# EAGLE board CEM3340 VCO B002 (EAGLE 7.4.0)
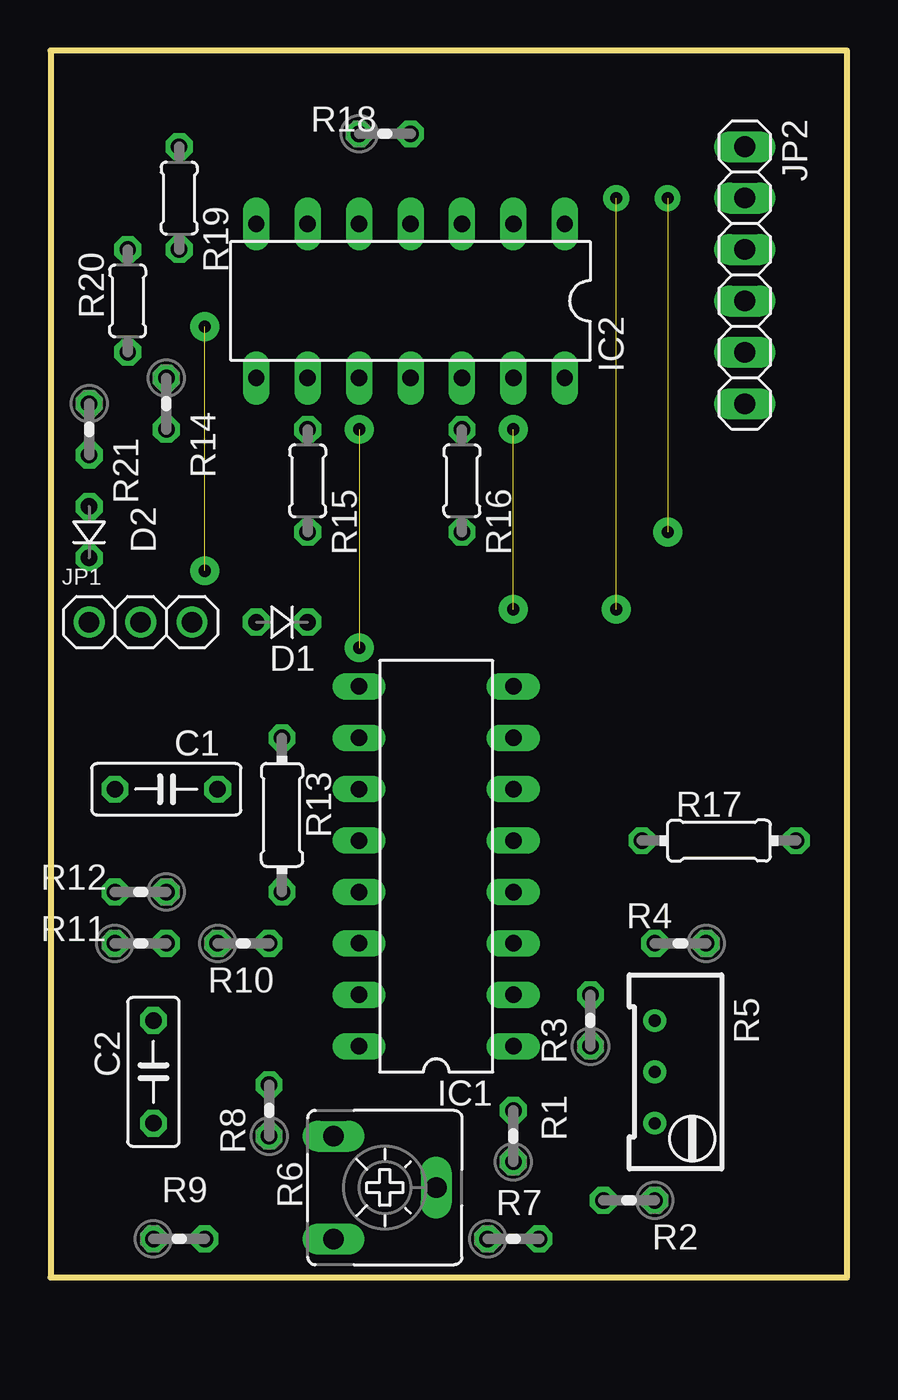
[diagram p0: board, top side]
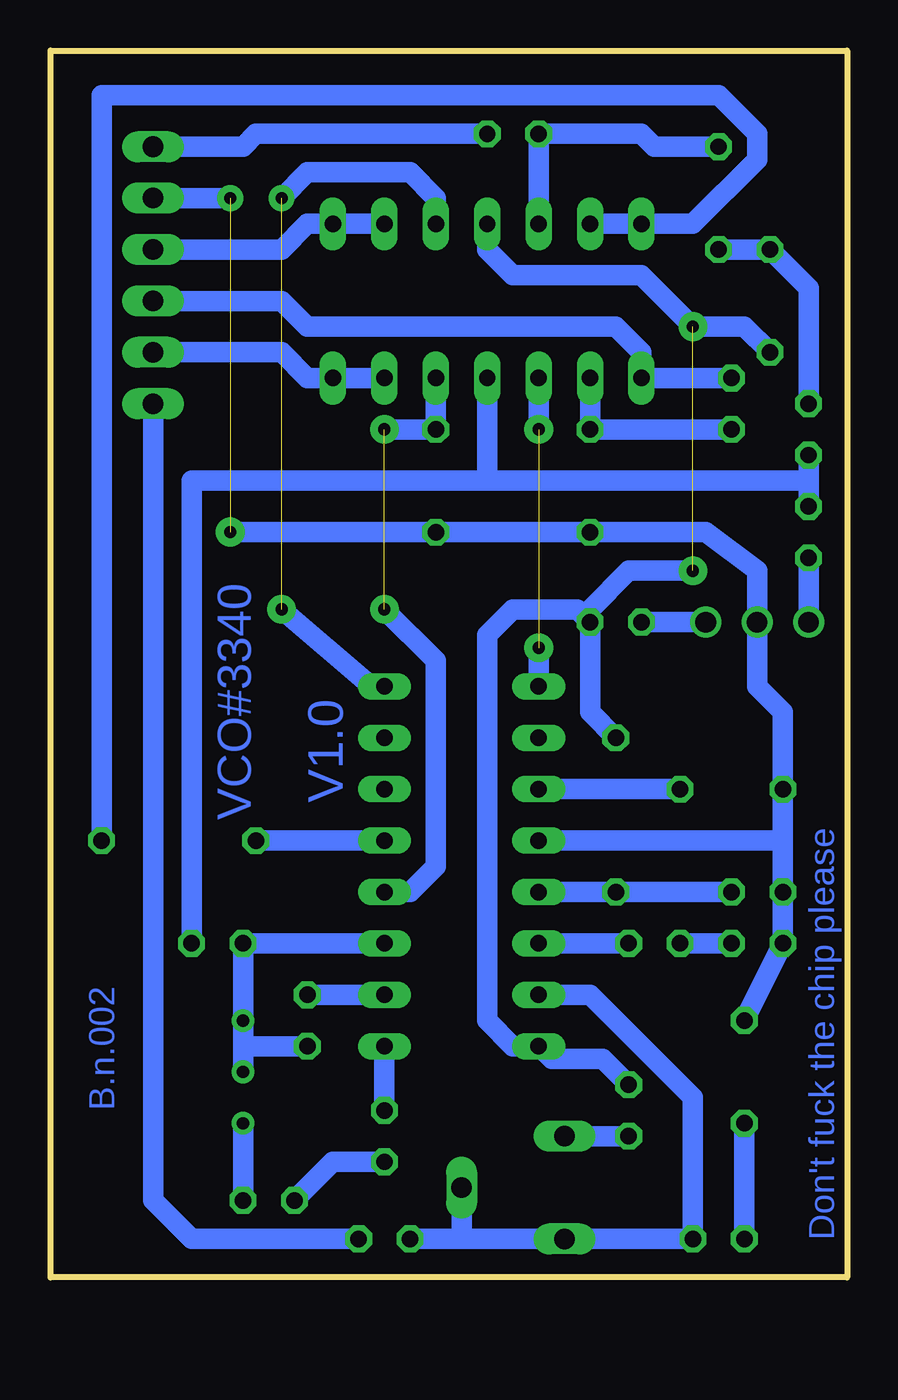
[diagram p1: board, bottom side, seen from below]

Size 39.35 x 60.63 mm. Coordinates in mm from the lower left corner, seen from the top.
Outline: 0,0 39.35,0 39.35,60.63 0,60.63 0,0
Copper layers (1*16): Top 0.035mm / dielectric 1.5mm / Bottom 0.035mm
Design rules "default": minimum track width 10mil, minimum drill 24mil, track to track 8mil, track to pad 8mil, pad to pad 8mil, via to via 8mil, smd to smd 8mil, copper to edge 40mil, drill to drill 8mil, minimum pad ring 10mil, minimum via ring 8mil, stop-mask expansion 4mil, vias tented up to drill 0mil, thermal gap 10mil

## Footprints (pad centres in the part's own frame; a part is rotated, then mirrored left to right if it is on the bottom)
C050-025X075 = drill 0.813 octagon: 1 -2.54,0; 2 2.54,0
D-2.5 = drill 0.813 octagon: A 1.27,0; C -1.27,0
DIL16 = drill 0.813 long: 1 -8.89,-3.81; 2 -6.35,-3.81; 3 -3.81,-3.81; 4 -1.27,-3.81; 5 1.27,-3.81; 6 3.81,-3.81; 7 6.35,-3.81; 8 8.89,-3.81; 9 8.89,3.81; 10 6.35,3.81; 11 3.81,3.81; 12 1.27,3.81; 13 -1.27,3.81; 14 -3.81,3.81; 15 -6.35,3.81; 16 -8.89,3.81
DIL14 = drill 0.813 long: 1 -7.62,-3.81; 2 -5.08,-3.81; 3 -2.54,-3.81; 4 0,-3.81; 5 2.54,-3.81; 6 5.08,-3.81; 7 7.62,-3.81; 8 7.62,3.81; 9 5.08,3.81; 10 2.54,3.81; 11 0,3.81; 12 -2.54,3.81; 13 -5.08,3.81; 14 -7.62,3.81
1X03 = drill 1.016: 1 -2.54,0; 2 0,0; 3 2.54,0
1X06 = drill 1.016 long: 1 -6.35,0; 2 -3.81,0; 3 -1.27,0; 4 1.27,0; 5 3.81,0; 6 6.35,0
0204V = drill 0.813 octagon: 1 -1.27,0; 2 1.27,0
RTRIM64W = drill 0.61: 1 1.27,-2.54; 2 1.27,0; 3 1.27,2.54
CA6V = drill 1.016 long: A -2.54,-2.54; E 2.54,-2.54; S 0,2.54
0204/7 = drill 0.813 octagon: 1 -3.81,0; 2 3.81,0
0204/5 = drill 0.813 octagon: 1 -2.54,0; 2 2.54,0

## Placement (x,y rotation side)
C1  [C050-025X075]  5.71,24.13 0 top
C2  [C050-025X075]  5.08,10.16 90 top
D1  [D-2.5]  11.43,32.38 180 top
D2  [D-2.5]  1.91,36.83 90 top
IC1  CEM3340  [DIL16]  19.05,20.32 90 top
IC2  TL084P  [DIL14]  17.78,48.26 180 top
JP1  [1X03]  4.45,32.38 0 top
JP2  [1X06]  34.29,49.53 270 top
R1  [0204V]  22.86,6.99 90 top
R2  [0204V]  28.57,3.81 180 top
R3  [0204V]  26.67,12.7 90 top
R4  [0204V]  31.11,16.51 180 top
R5  [RTRIM64W]  31.11,10.16 180 top
R6  [CA6V]  16.51,4.45 270 top
R7  [0204V]  22.86,1.91 0 top
R8  [0204V]  10.79,8.26 90 top
R9  [0204V]  6.35,1.91 0 top
R10  [0204V]  9.53,16.51 0 top
R11  [0204V]  4.45,16.51 0 top
R12  [0204V]  4.45,19.05 180 top
R13  [0204/7]  11.43,22.86 270 top
R14  [0204V]  5.71,43.18 270 top
R15  [0204/5]  12.7,39.37 270 top
R16  [0204/5]  20.32,39.37 270 top
R17  [0204/7]  33.02,21.59 0 top
R18  [0204V]  16.51,56.52 0 top
R19  [0204/5]  6.35,53.34 270 top
R20  [0204/5]  3.81,48.26 90 top
R21  [0204V]  1.91,41.91 270 top

## Library data of the parts
C1 C2 R1-R4 R7-R21 = resistor
D1 D2 = diode
IC1 = CEM
IC2 = linear
JP1 = adafruit
JP2 = pinhead
R5 = rcl
R6 = pot

## Nets
GND: C1.1 C2.2 IC1.12 JP1.2 JP2.2 R11.1 R12.2 R15.2 R16.2
N$1: IC1.1 R1.2
N$2: R1.1 R2.2
N$3: R2.1 R5.3
N$4: IC1.3 R3.1 R4.2 R5.1 R5.2
N$5: IC1.14 R10.2
N$6: IC1.2 R3.2
N$7: R10.1 R11.2
N$8: IC1.13 R12.1 R13.2
N$9: JP2.6 R7.2
N$10: C1.2 IC1.11
N$11: IC2.1 IC2.2 JP2.3
N$12: IC1.8 IC2.3
N$13: R6.A R8.1
N$14: IC1.5 R17.1
N$15: IC1.15 R6.E R6.S R7.1 R9.2
N$16: C2.1 R9.1
N$17: IC2.9 R14.2 R15.1
N$18: IC2.8 JP2.4 R14.1
N$19: IC1.9 IC2.10
N$20: IC2.13 IC2.14 JP2.5
N$21: JP2.1 R18.2
N$22: IC1.4 IC2.12 R16.1
N$23: IC2.6 IC2.7 R17.2
N$24: R19.2 R20.2 R21.1
N$25: IC2.5 R18.1 R19.1
N$30: D1.A JP1.3
N$33: D2.C JP1.1
V+: D1.C IC1.16 IC2.4 R8.2 R13.1 R20.1
V-: D2.A IC2.11 R4.1 R21.2

## Tracks (layer width: path | path; a pad name or v marks a point on that pad's centre or on a via)
GND  (via drill 0.6 pad 1.42)  (1 unrouted)
  Bottom 1.016: C1.1 3.17,27.94 4.45,29.21 JP1.2 4.45,34.92 6.99,36.83 R15.2 R16.2 v30.48,36.83 | C2.2 R11.1 R12.2 3.17,21.59 | IC1.12 3.17,21.59 | 3.17,21.59 C1.1 | 3.17,24.77 C1.1 | JP2.2 30.48,53.34
N$1
  Bottom 1.016: IC1.1 R1.2
N$2
  Bottom 1.016: R1.1 25.4,5.71 R2.2
N$3
  Bottom 1.016: R2.1 R5.3
N$4
  Bottom 1.016: 29.84,11.43 R5.1 R4.2 IC1.3 | R5.2 29.84,11.43 | 29.84,11.43 R3.1
N$5
  Bottom 1.016: IC1.14 R10.2
N$6
  Bottom 1.016: R3.2 IC1.2
N$7
  Bottom 1.016: R10.1 R11.2
N$8
  Bottom 1.016: IC1.13 R13.2 R12.1
N$9
  Bottom 1.016: JP2.6 34.29,3.81 32.38,1.91 R7.2
N$10
  Bottom 1.016: IC1.11 C1.2
N$11
  Bottom 1.016: IC2.2 IC2.1 26.67,52.07 27.94,50.8 JP2.3
N$12  (via drill 0.6 pad 1.27)  (1 unrouted)
  Bottom 1.016: IC2.3 20.32,53.34 21.59,54.61 26.67,54.61 v27.94,53.34 | IC1.8 23.5,29.21 27.94,33.02
N$13
  Bottom 1.016: R6.A R8.1
N$14
  Bottom 1.016: R17.1 IC1.5
N$15
  Bottom 1.016: 19.05,1.91 R6.E R9.2 7.62,8.89 12.7,13.97 IC1.15 15.88,13.97 | 19.05,1.91 R7.1 | 19.05,1.91 R6.S
N$16
  Bottom 1.016: R9.1 C2.1
N$17
  Bottom 1.016: R14.2 R15.1 IC2.9
N$18
  Bottom 1.016: R14.1 IC2.8 10.16,45.72 11.43,46.99 26.67,46.99 27.94,48.26 JP2.4
N$19  (1 unrouted)
  Bottom 1.016: IC1.9 15.24,31.11 | IC2.10 15.24,41.91
N$20
  Bottom 1.016: IC2.13 IC2.14 26.67,44.45 27.94,45.72 JP2.5
N$21
  Bottom 1.016: R18.2 29.21,56.52 29.84,55.88 JP2.1
N$22  (via drill 0.6 pad 1.42)  (1 unrouted)
  Bottom 1.016: IC1.4 21.59,19.05 20.32,20.32 20.32,30.48 v22.86,33.02 | IC2.12 R16.1 22.86,41.91
N$23
  Bottom 1.016: IC2.6 IC2.7 7.62,52.07 4.45,55.24 4.45,56.52 6.35,58.42 36.83,58.42 R17.2
N$24
  Bottom 1.016: R19.2 R20.2 1.91,48.9 R21.1
N$25
  Bottom 1.016: IC2.5 R18.1 10.16,56.52 9.53,55.88 R19.1
N$26  (via drill 0.6 pad 1.42)
  other vias: 7.62,34.92
N$27  (via drill 0.6 pad 1.42)
  other vias: 27.94,33.02
N$28  (via drill 0.6 pad 1.42)
  other vias: 15.24,41.91
N$29  (via drill 0.6 pad 1.42)
  other vias: 15.24,31.11
N$30
  Bottom 1.016: JP1.3 D1.A
N$31  (via drill 0.6 pad 1.27)
  other vias: 30.48,53.34
N$32  (via drill 0.6 pad 1.42)
  other vias: 22.86,41.91
N$33
  Bottom 1.016: JP1.1 D2.C
V+  (via drill 0.6 pad 1.42)  (1 unrouted)
  Bottom 1.016: R8.2 12.06,10.79 14.61,10.79 IC1.16 16.51,11.43 17.78,12.7 17.78,31.75 16.51,33.02 13.34,33.02 D1.C | IC2.4 17.78,50.8 16.51,49.53 10.16,49.53 v7.62,46.99 5.08,46.99 R20.1 | R13.1 12.7,27.94 D1.C | D1.C 12.7,33.02 10.79,34.92 7.62,34.92
V-
  Bottom 1.016: R4.1 32.38,39.37 17.78,39.37 | 17.78,39.37 IC2.11 | 1.91,39.37 17.78,39.37 | D2.A 1.91,39.37 | 1.91,39.37 R21.2

## Text on the board
Bottom: VCO#3340 | V1.0 | Don't fuck the chip please | B.n.002